# Altium PCB TPS54202.PcbDoc
Units mil, origin at the board's own origin, x right, y up, seen from the top; angles counter-clockwise.
Board outline 625 x 1020 mil, 2 copper layers (Top Layer, Bottom Layer); 15 components, 8 nets, 37 pads, 17 vias.
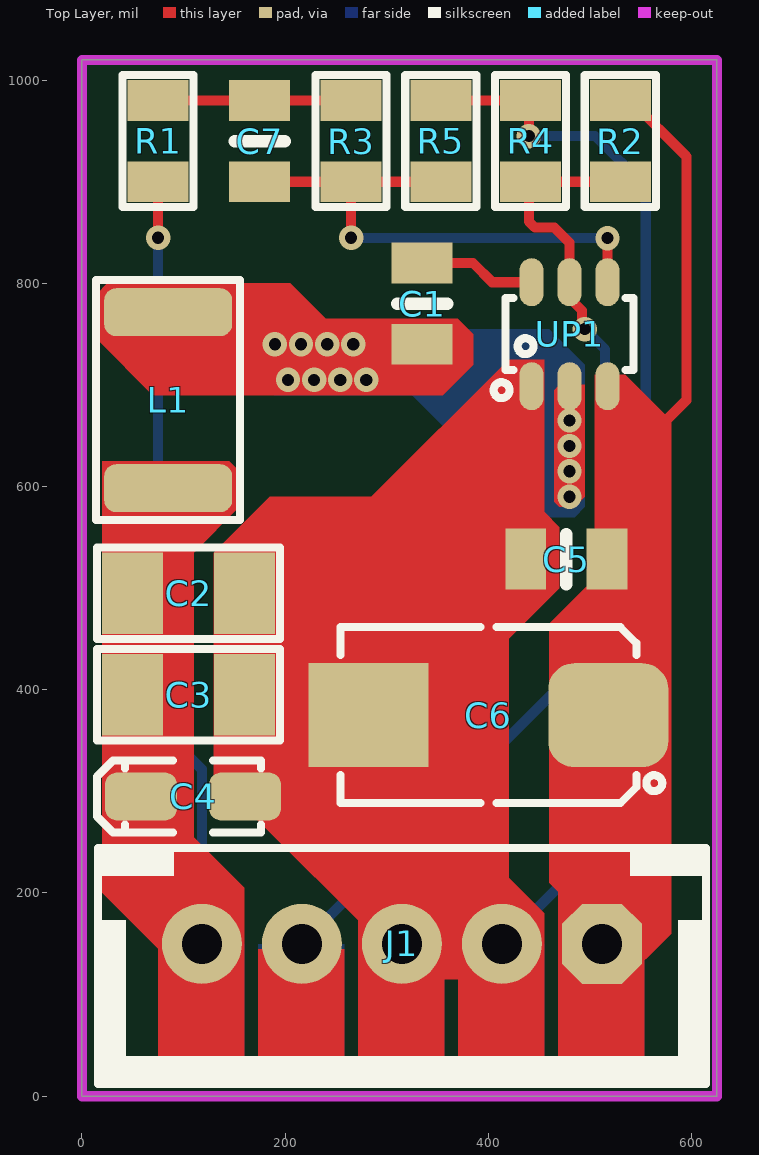
[diagram p0: Top Layer view]
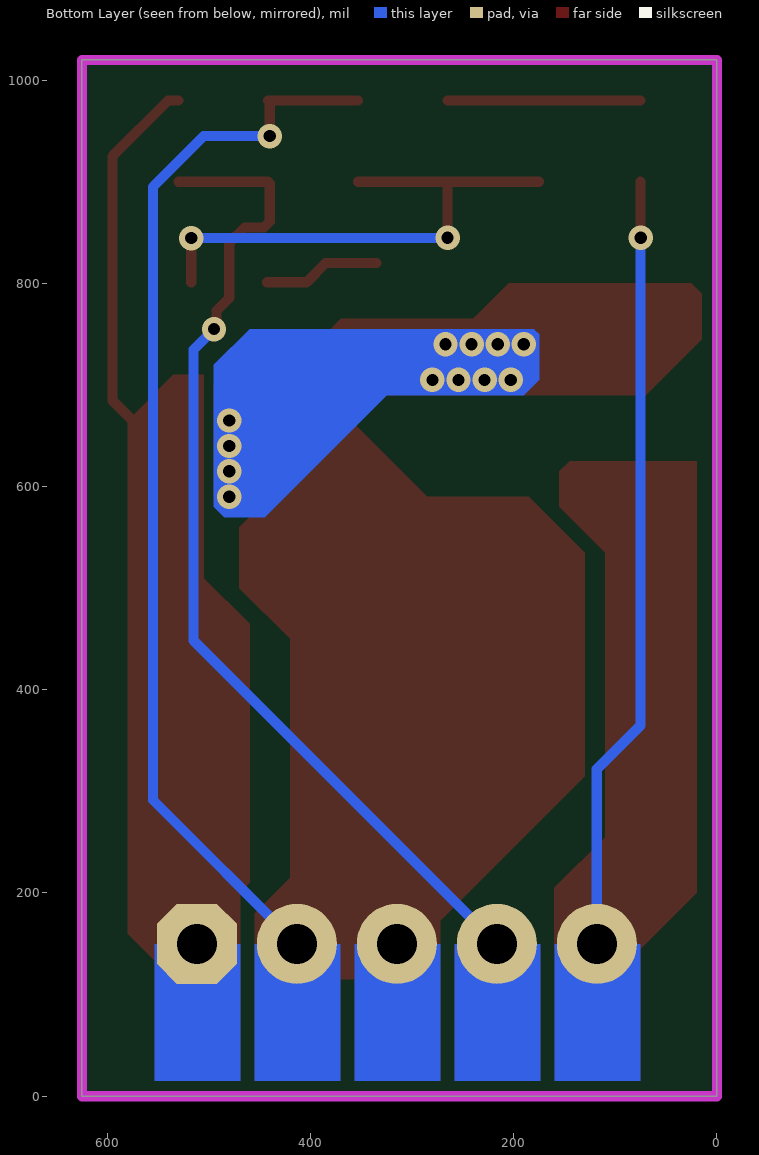
[diagram p1: Bottom Layer view, seen from below]
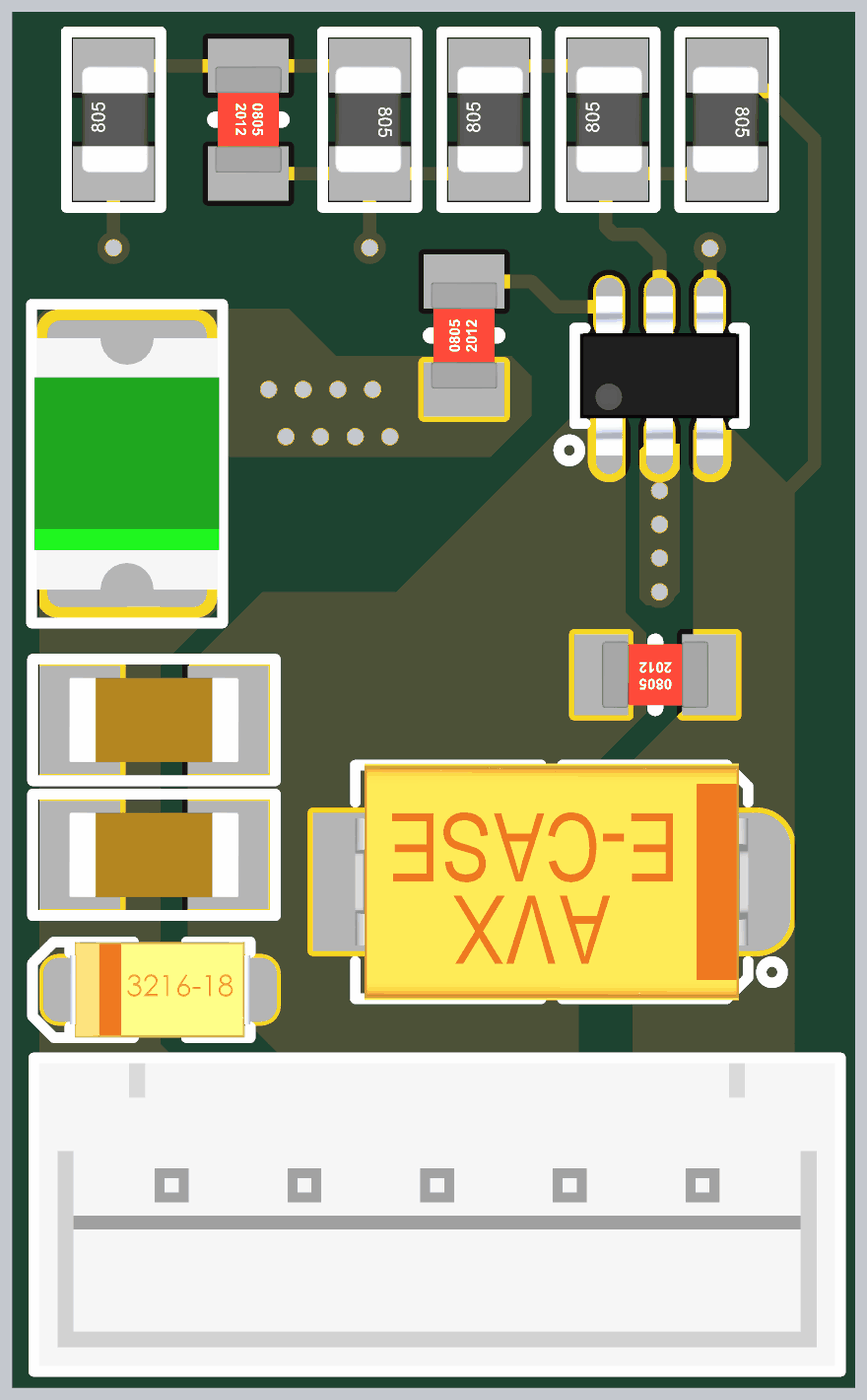
[diagram p2: 3D render of the assembled board from above, using the file's embedded part models]

## Layer stack, top to bottom
Top Solder: solder mask 0.4, Solder Resist, Dk 3.5
Top Layer: signal copper 1.4
Dielectric 1: dielectric 12.6, FR-4, Dk 4.8
Bottom Layer: signal copper 1.4
Bottom Solder: solder mask 0.4, Solder Resist, Dk 3.5

## Board outline
0,0 625,0 625,1020 0,1020

## Design rules (kind name [scope] priority, off if disabled: settings)
Clearance [All] p1: gap=10 ignorepadtopadclearanceinfootprint=FALSE except(0: Arc-Hole Track-Hole SMDPad-Hole THPad-Hole Via-Hole Fill-Hole Poly-Hole Region-Hole Text-Hole)
PolygonConnect [All] p1: connectstyle=Relief reliefconductorwidth=10 reliefentries=4 polygonreliefangle="90 Angle" airgapwidth=10
RoutingVias [All] p1: holewidth=12 width=24 viastyle="Through Hole" minholewidth=12 minwidth=24 maxholewidth=12 maxwidth=24
SolderMaskExpansion Via [IsVia] p1: expansion=4 istentingtop=TRUE
SolderMaskExpansion [All] p2: expansion=4 istentingtop=FALSE
Width [All] p1: maxlimit=10 minlimit=10 preferedwidth=10
30 further rules are at their usual default settings.

## Components (designator, comment, footprint, x,y, rotation, side; value= is the part's Value field where it differs from the comment)
C1 "100nF" SMD-0805C 335,780 r0 top value=10000pF
C2 "0.033µF" SMD-1206C 105,495 r90 top
C3 "0.033µF" SMD-1206C 105,395 r90 top
C4 "10uF" C_TN_3216 109.43,295 r0 top
C5 "100nF" SMD-0805C 476.82,528.51 r90 top value=10000pF
C6 "220uF" C_TN_7343 400,375 r180 top
C7 "100nF" SMD-0805C 175,940 r180 top value=10000pF
J1 "XH_5" XH_5 315,150 r180 top
L1 "10uH" F1812 85,685 r270 top
R1 "1" SMD-0805-RES 75,940 r0 top
R2 "1" SMD-0805-RES 530,940 r180 top
R3 "1" SMD-0805-RES 265,940 r180 top
R4 "1" SMD-0805-RES 441.67,940 r0 top
R5 "1" SMD-0805-RES 353.33,940 r0 top
UP1 "TPS54202" SOT23_6 480,750 r90 top

## Footprints (in the part's own frame and the unit in brackets; to place one, negate y for a bottom-side part, rotate by r counter-clockwise, add the part's x,y. Pads: shape width x height; smd on the part's side, far side on the other; paste and mask are expansions set on the pad)
C_TN_3216 [mm] "CAPACITOR, TAN A, 1206P, 3.2x1.6mm"
  rrect50% 1.8x1.2 smd mask+0.075: 1(-1.3,0) 2(1.3,0)
  Top Layer pour cut-out: -0.762,0.9 0.762,0.9 0.762,-0.9 -0.762,-0.9
  silkscreen extent -2.4,-0.9 1.7,0.9, body extent -1.7,-0.9 1.7,0.9, height 1.7
C_TN_7343 [mm] "CAPACITOR, TAN D, TAN E, TAN Y, TAN X, 7343P, 7.3X4.3mm"
  rrect50% 3x2.6 smd: 1(-3,0)
  rect 3x2.6 smd: 2(3,0)
  Top Layer pour cut-out: -2.032,2.2 -2.032,-2.2 2.032,-2.2 2.032,2.2
  silkscreen extent -4.35,-2.2 3.7,2.2, body extent -3.7,-2.22 3.7,2.23, height 4.2
F1812 [mm] "FUSE, 4.50x3.20mm"
  rrect50% 1.2x3.2 smd paste-0.1 mask+0.1: 1(-2.2,0) 2(2.2,0)
  silkscreen extent -3,-1.8 3,1.8, body extent -2.36,-1.74 2.37,1.74, height 1.03
SMD-0805-RES [mil]
  rect 60x40 smd: 1(0,40) 2(0,-40)
  silkscreen extent -35,-65 35,65, body extent -24,-39 26,39, height 31
SMD-0805C [mil]
  rect 60x40 smd: 1(0,40) 2(0,-40)
  silkscreen extent -25,0 25,0, body extent -25,-39 25,39, height 35
SMD-1206C [mil]
  rect 80x60 smd: 1(0,55) 2(0,-55)
  silkscreen extent -45,-90 45,90, body extent -31,-63 32,63, height 39
SOT23_6 [mm] "SOT-23-6, DDC, DBV, MICRO6, SOT-26, SOT457, SuperSOT6, TSOP-6, HMC313, TSOT, 1.5x3mm, Pitch 0.65mm, CA531, MO-178AB, MO-193AA"
  oval 1.2x0.6 smd paste-0.05: 1(-1.3,0.95) 2(-1.3,0) 3(-1.3,-0.95) 4(1.3,-0.95) 5(1.3,0) 6(1.3,0.95)
  silkscreen extent -1.6,-1.6 0.9,1.9, body extent -1.5,-1.5 1.5,1.5, height 1.3
XH_5 [mm] "PW10-xx-M, JST-BxB-XH-A pitch: 2.5mm"
  oct 2x2 hole 1: 1(-5,0)
  round 2 hole 1: 2(-2.5,0) 3(0,0) 4(2.5,0) 5(5,0)
  silkscreen extent -7.6,-2.4 7.6,3.5, body extent -7.5,-2.3 7.5,3.4, height 7

## Part data
C1 C5 C7: library part GC321AD72E103KX01D, "CAP CER 100nF 50V X7T 0805", Digi-Key Part Number=490-13986-1-ND, Manufacturer="Murata Electronics North America", Operating Temperature="-55°C ~ 125°C", Package / Case="0805 (2012 Metric)", Ratings=AEC-Q200, Temperature Coefficient=X7T, Tolerance=±10%, Voltage=250V, @ qty=0, Applications=Automotive, Datasheets=http://search.murata.co.jp/Ceramy/image/img/A01X/G101/ENG/GC321AD72E103KX01-01.pdf, Factory Stock=0, Features=-, Height - Seated (Max)=-, Image=//media.digikey.com/Renders/Murata%20Renders/0805(GC3)200x125.jpg, Lead Spacing=-, Lead Style=-, Minimum Quantity=1, Mounting Type="Surface Mount, MLCC", Packaging="Cut Tape (CT)", Part Number=GC321AD72E103KX01D, Part Status=Active, Quantity Available=4000, Series=GC3, Size / Dimension="0.079\" L x 0.049\" W (2.00mm x 1.25mm)", Thickness (Max)="0.039\" (1.00mm)", Unit Price (USD)=0.3
C2 C3: library part GC331AD72E333KX01D, "CAP CER 0.033UF 250V X7T 1206", Digi-Key Part Number=490-13989-1-ND, Manufacturer="Murata Electronics North America", Operating Temperature="-55°C ~ 125°C", Package / Case="1206 (3216 Metric)", Ratings=AEC-Q200, Temperature Coefficient=X7T, Tolerance=±10%, Voltage=250V, @ qty=0, Applications=Automotive, Datasheets=http://search.murata.co.jp/Ceramy/image/img/A01X/G101/ENG/GC331AD72E333KX01-01.pdf, Factory Stock=0, Features=-, Height - Seated (Max)=-, Image=//media.digikey.com/Renders/Murata%20Renders/1206(GC3)320x160.jpg, Lead Spacing=-, Lead Style=-, Minimum Quantity=1, Mounting Type="Surface Mount, MLCC", Packaging="Cut Tape (CT)", Part Number=GC331AD72E333KX01D, Part Status=Active, Quantity Available=3999, Series=GC3, Size / Dimension="0.126\" L x 0.063\" W (3.20mm x 1.60mm)", Thickness (Max)="0.039\" (1.00mm)", Unit Price (USD)=0.33
C4: library part CAP_SMD_TAN_10uF_6.3V, "CAP, SMD, TAN", MANF=VISHAY, MANF_P#=T55A106M6R3C0300, PARAM="20%, 300mOhm, -55~105oC", PARAM2=6.3V, PRICE=0.46$
C6: library part CAP_SMD_TAN_220uF, "CAP, SMD, TAN", MANF=VISHAY, MANF_P#=T55D227M6R3C0035, PARAM="20%, 35mOhm, -55~105oC", PARAM2=6.3V, PRICE=1.9$
J1: "JST-XH pitch: 2.5mm", MANF=JST, MANF_P#=JST-B5B-XHA
L1: library part IND_SMD_10uH_2A, "INDUCTOR, 10uH 2A, 38mOhm, 2626", ASSEMBLY=ASSEMBLY, DESC="INDUCTOR, 10uH 2A, 38mOhm, 2626", MANF=Bourns, MANF_P#=SRR6038-100Y, PARAM="2A Irms, 2.05A Isat", PARAM2=38mOhm, PRICE=2.5$
R1 R2 R3 R4 R5: library part ERJ-6BQF1R0V, "RES SMD 1 OHM 1% 1/3W 0805", Digi-Key Part Number=P17499CT-ND, Manufacturer="Panasonic Electronic Components", Operating Temperature="-55°C ~ 125°C", Package / Case="0805 (2012 Metric)", Power (Watts)="0.333W, 1/3W", Supplier Device Package=0805, Temperature Coefficient=±200ppm/°C, Tolerance=±1%, @ qty=1500, Composition="Thick Film", Datasheets=https://industrial.panasonic.com/cdbs/www-data/pdf/RDA0000/AOA0000C239.pdf, Factory Stock=0, Failure Rate=-, Features="Automotive AEC-Q200, Current Sense", Height - Seated (Max)="0.028\" (0.70mm)", Image=//media.digikey.com/Renders/Panasonic%20Renders/ERJ-0805%20Pkg.jpg, Minimum Quantity=1, Number of Terminations=2, Packaging="Cut Tape (CT)", Part Number=ERJ-6BQF1R0V, Part Status=Active, Quantity Available=808, Series=ERJ, Size / Dimension="0.079\" L x 0.049\" W (2.00mm x 1.25mm)", Unit Price (USD)=0.05834
UP1: library part VREG_TPS54202_SOT23-6, "REG, Switching, Buck, 2A, ADJ, 0.5MHz, 4.5~28VIN, SOT23-6", ASSEMBLY=ASSEMBLY, MANF=TI, MANF_P#="TPS54202DDC, TPS54202HDDC", PARAM="2A, 0.5MHz, -40~125oC", PARAM2="4.5~28VIN, ADJ, 148mΩ RDSon", PRICE=2200t@LION

## Via types
v1: diameter 24, hole 12, Top Layer to Bottom Layer, tented both sides, 17 vias

## Nets (pads, with @x,y where several pads share a name; then routed paths per layer and width w, separated by ;. In a path a pad name is that pad's centre, name@x,y a point inside that pad or via, vN(x,y) a via of type N, cw(c..) or ccw(c..) an arc to the next point about the centre after c; other vN are vias at no path point)
+3V3: C2.1 C3.1 C4.1 J1.5 L1.2 R1.2 | length 768.5
  Top Layer w10: v1(75,845) R1.2 ; L1.2 L1.2@85.43,598.82
  Bottom Layer w10: v1(75,845) 75,365 118.15,321.85 J1.5
+12: C5.2 C6.1 J1.1 R2.2 UP1.3 | length 427.6
  Top Layer w10: 520,625 535,625 595,685 595,925 540,980 R2.2
EN: J1.4 R2.1 R4.2 UP1.5 | length 1004.9
  Top Layer w10: v1(495,755) 492.32,757.68 492.32,773.36 480,785.68 UP1.5 480,840 465,855 445.86,855 440,860.86 440,898.33 R4.2 R2.1
  Bottom Layer w10: J1.4 515,448.43 515,735 v1(495,755)
GND: C2.2 C3.2 C4.2 C5.1 C6.2 J1.2 J1.3 R4.1 R5.1 UP1.1 | length 1063.4
  Top Layer w10: R5.1 R4.1 440,978.33 v1(440,945)
  Bottom Layer w10: J1.2 555,291.57 555,895 505,945 v1(440,945)
NetC1_1: C1.1 UP1.6 | length 115.4
  Top Layer w10: C1.1 385,820 403.82,801.18 UP1.6
NetC1_2: C1.2 L1.1 UP1.2
  other v1: 480,590 480,615 480,640 480,665 202.86,705 228.57,705 254.29,705 280,705 190,740 215.71,740 241.43,740 267.14,740
NetC7_1: C7.1 R3.1 R5.2 UP1.4 | length 529.3
  Top Layer w10: C7.1 R3.1 ; v1(265,845) R3.1 ; R5.2 R3.1 ; UP1.4 v1(517.38,844.6)
  Bottom Layer w10: v1(265,845) 265.2,844.8 517.18,844.8 v1(517.38,844.6)
NetC7_2: C7.2 R1.1 R3.2 | length 190
  Top Layer w10: R1.1 C7.2 R3.2

## Keep-outs
Keep-Out Layer:
  the board outline again, w10

## Other copper
Top Layer:
  rectangle net +3V3: 75,15 160,165
  rectangle net EN: 173.43,15 258.43,145
  rectangle net GND: 271.85,15 356.85,200
  rectangle net GND: 370.28,15 455.28,145
  rectangle net +12: 468.7,15 553.7,290
  region net NetC1_2: 25,800 205,800 240,765 370,765 385,750 385,720 355,690 70,690 15,745 15,790
  region net NetC1_2: 470,700 495,700 495,590 485,580 470,580 465,585 465,695
  region net GND: 130,535 185,590 285,590 420,725 455,725 455,575 470,560 470,500 420,450 420,215 455,180 455,115 330,115 130,315 130,370
  region net +3V3: 20,625 20,200 75,145 160,145 160,205 110,255 110,535 155,580 155,615 145,625
  region net +12: 470,140 470,200 460,210 460,465 505,510 505,710 535,710 580,665 580,160 530,110
Bottom Layer:
  rectangle net +12: 468.7,15 553.7,150
  rectangle net GND: 370.28,15 455.28,150
  rectangle net GND: 271.85,15 356.85,150
  rectangle net EN: 173.43,15 258.43,150
  rectangle net +3V3: 75,15 160,150
  region net NetC1_2: 180,755 460,755 495,720 495,580 485,570 445,570 325,690 190,690 175,705 175,750